# Altium PCB errorSchema.PcbDoc
Units mil, origin at the board's own origin, x right, y up, seen from the top; angles counter-clockwise.
Board outline 6070 x 2260 mil, 2 copper layers (Top Layer, Bottom Layer); 71 components, 51 nets, 252 pads, 51 vias.
Unrouted connection lines stored in the file: 29.
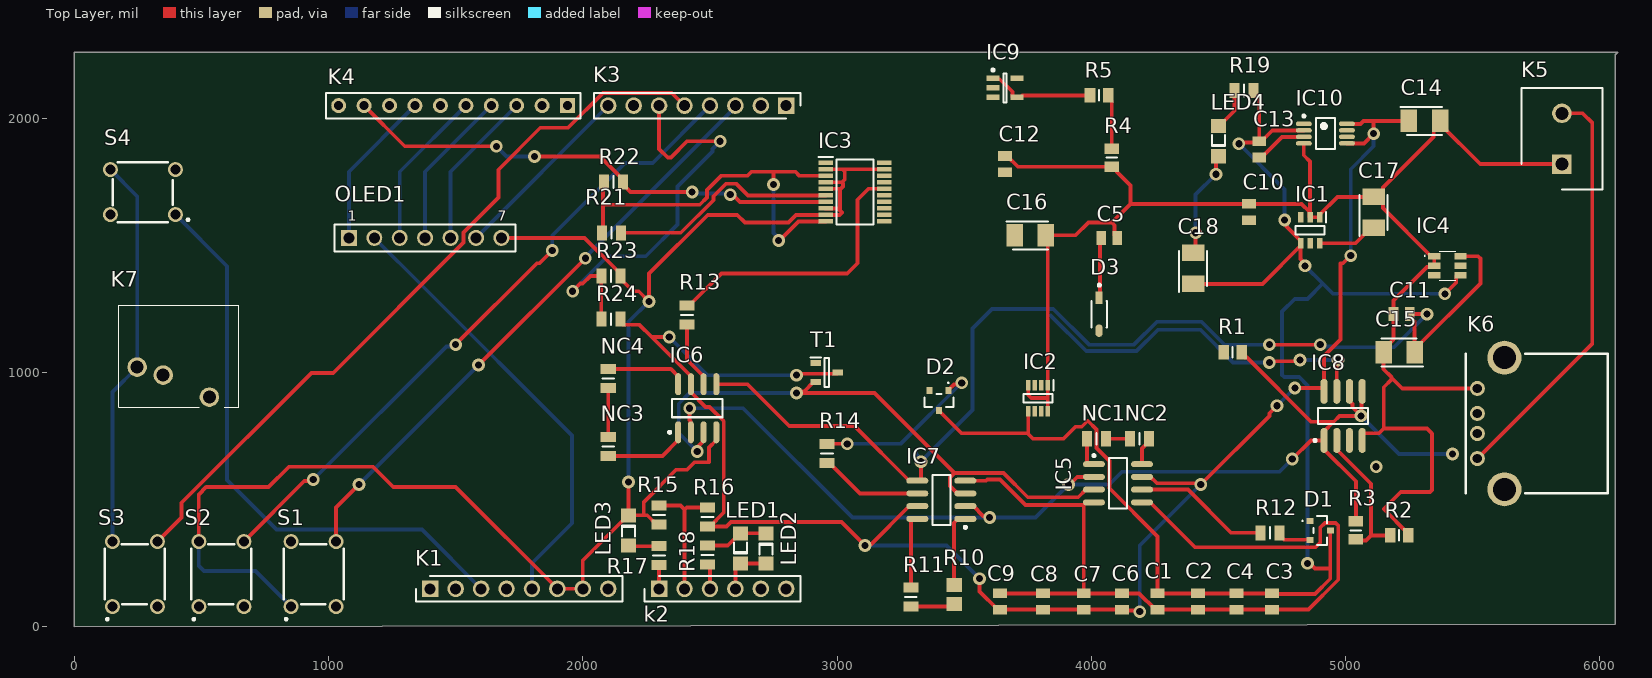
[diagram p0: Top Layer view]
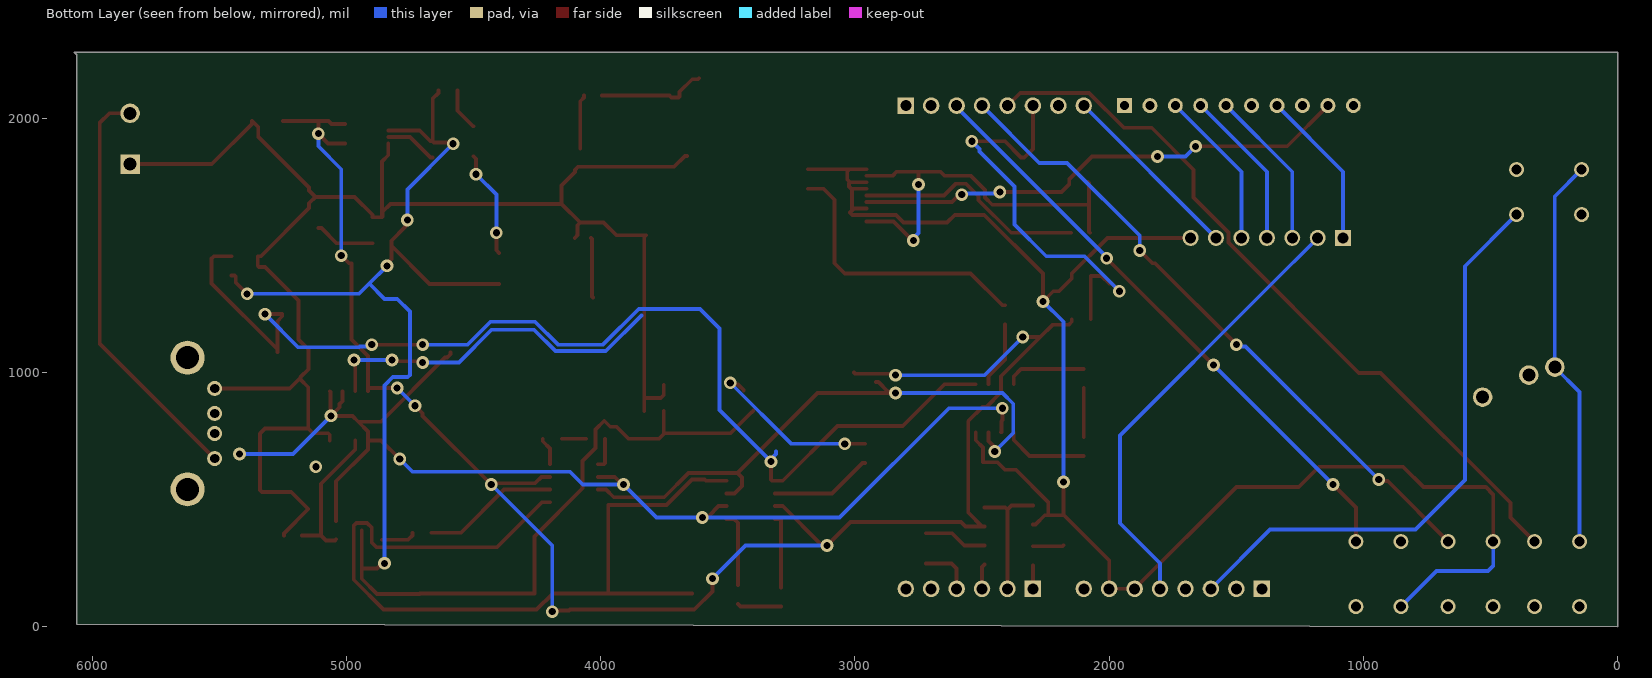
[diagram p1: Bottom Layer view, seen from below]
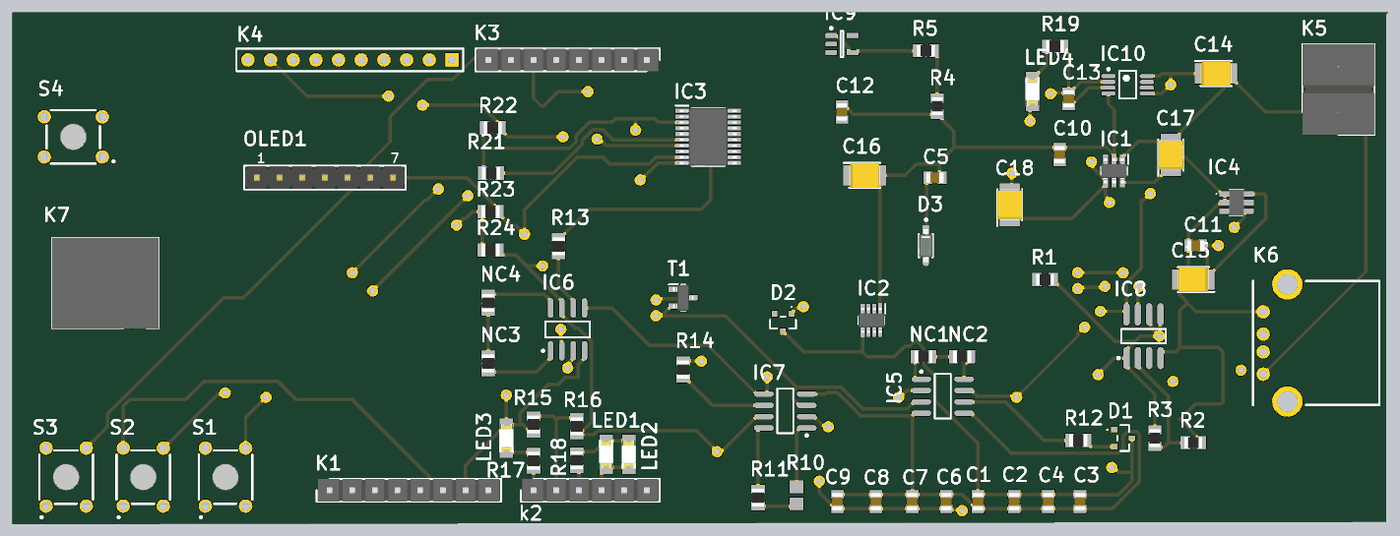
[diagram p2: 3D render of the assembled board from above, using the file's embedded part models]

## Layer stack, top to bottom
Top Solder: solder mask 0.4, Solder Resist, Dk 3.5
Top Layer: signal copper 1.4
Dielectric 1: dielectric 12.6, FR-4, Dk 4.8
Bottom Layer: signal copper 1.4
Bottom Solder: solder mask 0.4, Solder Resist, Dk 3.5

## Board outline
0,0 0,2260 6070,2260 6060,2250 6060,10

## Design rules (kind name [scope] priority, off if disabled: settings)
Clearance [All] p1: gap=10 ignorepadtopadclearanceinfootprint=TRUE except(0: SMDPad-Hole THPad-Hole Via-Hole Fill-Hole Poly-Hole Region-Hole Text-Hole; 8: Arc-Arc Arc-Track Arc-SMDPad Arc-THPad Arc-Via Arc-Fill Arc-Poly Arc-Region Arc-Text Arc-Hole Track-Track Track-SMDPad Track-THPad Track-Via Track-Fill Track-Poly Track-Region Track-Text Track-Hole)
PolygonConnect [All] p1: connectstyle=Relief reliefconductorwidth=10 reliefentries=4 polygonreliefangle="90 Angle" airgapwidth=10
RoutingVias [All] p1: holewidth=10 width=20 viastyle="Through Hole" minholewidth=10 minwidth=20 maxholewidth=10 maxwidth=20
SolderMaskExpansion [All] p1: expansion=4 istentingtop=FALSE
Width [All] p1: maxlimit=15 minlimit=15 preferedwidth=15 minimp=50.000000 maximp=50.000000 favimp=50.000000
30 further rules are at their usual default settings.

## Classes and differential pairs
component class totaal: C1 C2 C3 C4 C5 C6 C7 C8 C9 C10 C11 C13 C14 C15 C17 C18 D3 IC1 IC4 IC10 K7 LED4 R19
component class deel2: C12 C16 D1 D2 IC2 IC3 IC5 IC6 IC7 IC8 IC9 K1 k2 K3 K4 K5 K6 LED1 LED2 LED3 NC1 NC2 NC3 NC4 OLED1 R1 R2 R3 R4 R5 R10 R11 R12 R13 R14 R15 R16 R17 R18 R21 R22 R23 R24 S1 S2 S3 S4 T1

## Components (designator, comment, footprint, x,y, rotation, side; value= is the part's Value field where it differs from the comment)
C1 "MC0805B104K500CT" CAPC2012X90N 4260,100 r270 top
C2 "MC0805B104K500CT" CAPC2012X90N 4420,100 r270 top
C3 "MC0805B104K500CT" CAPC2012X90N 4710,100 r270 top
C4 "MC0805B104K500CT" CAPC2012X90N 4570,100 r270 top
C5 "MC0805B104K500CT" CAPC2012X90N 4070,1530 r180 top
C6 "MC0805B104K500CT" CAPC2012X90N 4120,100 r270 top
C7 "MC0805B104K500CT" CAPC2012X90N 3970,100 r270 top
C8 "MC0805B104K500CT" CAPC2012X90N 3810,100 r270 top
C9 "MC0805B104K500CT" CAPC2012X90N 3640,100 r270 top
C10 "MC0805B104K500CT" CAPC2012X90N 4620,1631.89 r270 top
C11 "MC0805B104K500CT" CAPC2012X90N 5220,1230 r0 top
C12 "MC0805B104K500CT" CAPC2012X90N 3660,1820 r90 top
C13 "MC0805N102J500CT" CAPC2012X90N 4660,1878.11 r90 top
C14 "T491B106M016AT" CAPPM3528X210N 5310,1990 r0 top
C15 "T491B106M016AT" CAPPM3528X210N 5210,1080 r180 top
C16 "T491B106M016AT" CAPPM3528X210N 3760,1540 r0 top
C17 "T491B106M016AT" CAPPM3528X210N 5110,1630 r90 top
C18 "T491B106M016AT" CAPPM3528X210N 4400,1410 r90 top
D1 "BAT54C" NXP-SOT23-3_V 4900,380 r90 top
D2 "BAT54C" NXP-SOT23-3_V 3400,890 r0 top
D3 "1N5819HW-7-F" FP-SOD123-IPC_B 4030,1230 r270 top
IC1 "LT1790ACS6-2.5#PBF" SOT95P280X100-6N 4860,1560 r270 top
IC2 "LTC2631CTS8-LZ12#TRMPBF" SOT65P280X100-8N 3790,900 r270 top
IC3 "LTC2309CF#PBF" SOP65P640X110-20N 3070,1710 r0 top
IC4 "LT1790BCS6-1.25#TRMPBF" LT1790BCS6125TRMPBF 5400,1420 r270 top
IC5 "LT1789CS8-1#PBF" LT-S8-8_N 4104.49,565 r0 top
IC6 "LT1789CS8-10#PBF" LT-S8-8_N 2450,860 r90 top
IC7 "LT1789CS8-10#PBF" LT-S8-8_N 3410,500 r180 top
IC8 "LTC6241HVCS8#PBF" LT-S8-8_M 4990,830 r90 top
IC9 "LTC2054HVCS5#TRMPBF" LT-S5-5-TSOT-23_N 3660,2120 r0 top
IC10 "LT1762EMS8-5#PBF" LT-MS8_N 4920,1940 r0 top
K1 "2211S-08G" HDRV8W64P0X254_1X8_2032X254X874P 1400,150 r0 top
k2 "2211S-06G" HDRV6W64P0X254_1X6_1524X254X1774P 2300,150 r0 top
K3 "2211S-08G" HDRV8W64P0X254_1X8_2032X254X874P 2800,2050 r180 top
K4 "Header 10" HDR1X10 1940,2050 r180 top
K5 "1729128" HDRV2W110P0X508_1X2_1016X810X1000P 5850,1820 r90 top
K6 "61400416021" USB-2.0-TYPE-A 6030,800 r90 top
K7 "NEB_J_21_R" NEBJ21R 247.64,1021.5 r0 top
LED1 "150120RS75000" 1206_A 2620,309.06 r90 top
LED2 "150120GS75000" 1206_A 2720,309.05 r270 top
LED3 "150120YS75000" 1206_A 2180,380 r270 top
LED4 "150120BS75000" 1206_A 4500,1910 r90 top
NC1 "0" RESC2014X65N 4020,740 r180 top
NC2 "0" RESC2014X65N 4190,740 r0 top
NC3 "MC01W08055100R" RESC2014X65N 2100,710 r270 top
NC4 "0" RESC2014X65N 2100,977.4 r90 top
OLED1 "61300711121" 61300711121 1380,1530 r0 top
R1 "MCTC0525B1000T5E" RESC2012X65N 4555.43,1080 r0 top
R2 "MCTC0525B1002T5E" RESC2012X65N 5210,360 r180 top
R3 "MCTC0525B1002T5E" RESC2012X65N 5040,380 r270 top
R4 "MCTC0525B1002T5E" RESC2012X65N 4080,1845.43 r90 top
R5 "MCTC0525B1002T5E" RESC2012X65N 4030,2090 r180 top
R10 "ERA6AEB223V" RESC2013X60X40ML20T25 3460,127.4 r90 top
R11 "220R 0.1%" RESC2014X65N 3290,117.4 r90 top
R12 "MC01W08055100R" RESC2014X65N 4702.6,370 r0 top
R13 "MC01W08055100R" RESC2014X65N 2410,1227.4 r90 top
R14 "100R" RESC2014X65N 2960,682.6 r90 top
R15 "3KR" RESC2014X65N 2300,440 r90 top
R16 "MC01W0805512K" RESC2014X65N 2490,432.6 r270 top
R17 "MC01W080551K" RESC2014X65N 2300,280 r270 top
R18 "MC01W080551K" RESC2014X65N 2490,282.6 r270 top
R19 "MC01W080551K" RESC2014X65N 4600,2110 r0 top
R21 "MC01W0805510K" RESC2014X65N 2112.6,1550 r180 top
R22 "MC01W0805510K" RESC2014X65N 2120,1750 r180 top
R23 "MC01W0805510K" RESC2014X65N 2110,1380 r180 top
R24 "22KR" RESC2014X65N 2110,1210 r0 top
S1 "FSM4JH" FSM4JH 941.42,207.95 r90 top
S2 "FSM4JH" FSM4JH 578.58,207.95 r90 top
S3 "FSM4JH" FSM4JH 238.58,207.95 r90 top
S4 "FSM4JH" FSM4JH 270,1710 r180 top
T1 "BC847C_AU,215" SOT95P230X110-3N 2960,1000 r0 top

## Footprints (in the part's own frame and the unit in brackets; to place one, negate y for a bottom-side part, rotate by r counter-clockwise, add the part's x,y. Pads: shape width x height; smd on the part's side, far side on the other; paste and mask are expansions set on the pad)
1206_A [mm] "Chip LED, 2-Leads, Body 3.2x1.6mm, IPC Medium Density"
  rect 1.4x1.5 smd: 1(-1.5,0) 2(1.5,0)
  silkscreen extent -0.5,-0.67 0.6,0.65, body extent -1.6,-0.8 1.6,0.8, height 0.68
61300711121 [mm] "Pin Header, pitch 2.54 mm, THT, Vertical, single row, 7p"
  rect 1.6x1.6 hole 1.1: 1(-7.62,0)
  round 1.6 hole 1.1: 2(-5.08,0) 3(-2.54,0) 4(0,0) 5(2.54,0) 6(5.08,0) 7(7.62,0)
  silkscreen extent -9.04,-1.34 9.04,1.34, body extent -8.89,-1.27 8.89,1.27, height 8.57
CAPC2012X90N [mm]
  rect 0.96x1.39 smd: 1(-0.81,0) 2(0.81,0)
  body extent -1,-0.63 1,0.63, height 0.9
CAPPM3528X210N [mm]
  rect 1.65x2.25 smd: 1(-1.55,0) 2(1.55,0)
  silkscreen extent -2.38,-1.4 1.75,1.4, body extent -1.75,-1.4 1.75,1.4, height 2.1
FP-SOD123-IPC_B [mil]
  rect 49.51x27.66 smd paste+0 mask+0: 1(-64.98,0)
  rrect100% 49.51x27.66 smd paste+0 mask+0: 2(64.98,0)
  silkscreen extent -119,-31 52,31, body extent -100,-40 100,40, height 10
FSM4JH [mm]
  round 1.5 hole 1: 1(-3.25,2.25) 2(3.25,2.25) 3(-3.25,-2.25) 4(3.25,-2.25)
  silkscreen extent -4.6,-3 3,3, body extent -3,-3.9 3,3.9
HDR1X10 [mm] "Connector; Header; 10 Position"
  rect 1.5x1.5 hole 0.9: 1(0,0)
  round 1.5 hole 0.9: 2(2.54,0) 3(5.08,0) 4(7.62,0) 5(10.16,0) 6(12.7,0) 7(15.24,0) 8(17.78,0) 9(20.32,0) 10(22.86,0)
  silkscreen extent -1.27,-1.27 24.13,1.27
HDRV2W110P0X508_1X2_1016X810X1000P [mm]
  rect 1.95x1.95 hole 1.3: 1(0,0)
  round 1.95 hole 1.3: 2(5.08,0)
  silkscreen extent -2.54,-4.05 7.62,4.05, body extent -2.54,-4.05 7.62,4.05, height 10
HDRV6W64P0X254_1X6_1524X254X1774P [mm]
  rect 1.65x1.65 hole 1.1: 1(0,0)
  round 1.65 hole 1.1: 2(2.54,0) 3(5.08,0) 4(7.62,0) 5(10.16,0) 6(12.7,0)
  silkscreen extent -1.45,-1.27 14.15,1.27, body extent -1.27,-1.27 13.97,1.27, height 17.74
HDRV8W64P0X254_1X8_2032X254X874P [mm]
  rect 1.65x1.65 hole 1.1: 1(0,0)
  round 1.65 hole 1.1: 2(2.54,0) 3(5.08,0) 4(7.62,0) 5(10.16,0) 6(12.7,0) 7(15.24,0) 8(17.78,0)
  silkscreen extent -1.45,-1.27 19.23,1.27, body extent -1.27,-1.27 19.05,1.27, height 8.74
LT1790BCS6125TRMPBF [mm]
  rect 0.62x1.22 smd: 1(-0.95,-1.31) 2(0,-1.31) 3(0.95,-1.31) 4(0.95,1.31) 5(0,1.31) 6(-0.95,1.31)
  silkscreen extent -1.45,-2.3 1.45,0.81, body extent -1.45,-0.81 1.45,0.81, height 1.1
LT-MS8_N [mm] "SOP, 8-Leads, Body 3x3mm, Pitch 0.65mm, IPC Medium Density"
  oval 1.6x0.45 smd: 1(-2.15,0.975) 2(-2.15,0.325) 3(-2.15,-0.325) 4(-2.15,-0.975) 5(2.15,-0.975) 6(2.15,-0.325) 7(2.15,0.325) 8(2.15,0.975)
  silkscreen extent -2.27,-1.55 0.95,1.87, body extent -1.55,-1.55 1.55,1.55, height 1.1
LT-S5-5-TSOT-23_N [mm] "SOT23, 5-Leads, Body 2.90x1.63mm, Pitch 0.95mm, IPC Medium Density"
  rect 1.3x0.55 smd: 1(-1.2,0.95) 2(-1.2,0) 3(-1.2,-0.95) 4(1.2,-0.95) 5(1.2,0.95)
  silkscreen extent -1.32,-1.45 0.15,1.9, body extent -0.87,-1.45 0.87,1.45, height 1
LT-S8-8_M [mm] "SOIC, 8-Leads, Body 4.9x3.9mm, Pitch 1.27mm, IPC Low Density"
  oval 2.5x0.7 smd: 1(-2.45,1.905) 2(-2.45,0.635) 3(-2.45,-0.635) 4(-2.45,-1.905) 5(2.45,-1.905) 6(2.45,-0.635) 7(2.45,0.635) 8(2.45,1.905)
  silkscreen extent -2.57,-2.5 0.8,2.93, body extent -2,-2.5 2,2.5, height 1.76
LT-S8-8_N [mm] "SOIC, 8-Leads, Body 4.9x3.9mm, Pitch 1.27mm, IPC Medium Density"
  oval 2.2x0.6 smd: 1(-2.4,1.905) 2(-2.4,0.635) 3(-2.4,-0.635) 4(-2.4,-1.905) 5(2.4,-1.905) 6(2.4,-0.635) 7(2.4,0.635) 8(2.4,1.905)
  silkscreen extent -2.52,-2.5 0.9,2.88, body extent -2,-2.5 2,2.5, height 1.76
NEBJ21R [mm]
  round 1.95 hole 1.3: 1(0,0) 2(2.6,-0.8) 3(7.2,-3)
  silkscreen extent -1.84,-4 10.16,6.2, body extent -1.84,-4 10.16,6.2, height 8.1
NXP-SOT23-3_V [mm] "SOT23, 3-Leads, Body 1.3x2.9mm, Pitch 0.95mm"
  rect 0.6x0.7 smd paste-0.05: 1(0.95,1) 2(-0.95,1) 3(0,-1)
  silkscreen extent -1.45,-0.65 1.45,1.79, body extent -1.45,-0.65 1.45,0.65, height 1.1
RESC2012X65N [mm]
  rect 1.05x1.45 smd: 1(-0.9,0) 2(0.9,0)
  silkscreen extent 0,-0.53 0,0.53, body extent -1,-0.63 1,0.63, height 0.65
RESC2013X60X40ML20T25 [mm] "Chip Resistor, 2-Leads, Body 2.00x1.25mm, IPC Low Density"
  rect 1.4x1.55 smd: 1(-0.95,0) 2(0.95,0)
  body extent -1.1,-0.72 1.1,0.72, height 0.6
RESC2014X65N [mm]
  rect 1x1.5 smd: 1(-0.95,0) 2(0.95,0)
  silkscreen extent 0,-0.59 0,0.59, body extent -1,-0.69 1,0.69, height 0.65
SOP65P640X110-20N [mm]
  rect 1.45x0.45 smd: 1(-2.925,2.925) 2(-2.925,2.275) 3(-2.925,1.625) 4(-2.925,0.975) 5(-2.925,0.325) 6(-2.925,-0.325) 7(-2.925,-0.975) 8(-2.925,-1.625) 9(-2.925,-2.275) 10(-2.925,-2.925) 11(2.925,-2.925) 12(2.925,-2.275) 13(2.925,-1.625) 14(2.925,-0.975) 15(2.925,-0.325) 16(2.925,0.325) 17(2.925,0.975) 18(2.925,1.625) 19(2.925,2.275) 20(2.925,2.925)
  silkscreen extent -3.65,-3.25 1.85,3.5, body extent -3.2,-3.25 3.2,3.25, height 1.1
SOT65P280X100-8N [mm]
  rect 1.05x0.45 smd: 1(-1.3,0.975) 2(-1.3,0.325) 3(-1.3,-0.325) 4(-1.3,-0.975) 5(1.3,-0.975) 6(1.3,-0.325) 7(1.3,0.325) 8(1.3,0.975)
  silkscreen extent -1.82,-1.45 0.42,1.55, body extent -1.4,-1.45 1.4,1.45, height 1
SOT95P230X110-3N [mm]
  rect 1.05x0.6 smd: 1(-1.1,0.95) 2(-1.1,-0.95) 3(1.1,0)
  silkscreen extent -1.62,-1.45 0.22,1.5, body extent -1.15,-1.45 1.15,1.45, height 1.1
SOT95P280X100-6N [mm]
  rect 1.05x0.55 smd: 1(-1.3,0.95) 2(-1.3,0) 3(-1.3,-0.95) 4(1.3,-0.95) 5(1.3,0) 6(1.3,0.95)
  silkscreen extent -1.82,-1.45 0.43,1.58, body extent -1.4,-1.45 1.4,1.45, height 1
USB-2.0-TYPE-A [mm]
  round 1.5 hole 0.92: 1(-3.5,13.01) 2(-1,13.01) 3(1,13.01) 4(3.5,13.01)
  round 3.4 hole 2.3: 5(-6.57,10.3) 6(6.57,10.3)
  silkscreen extent -6.95,0 6.95,14.15

## Part data
C1 C2 C3 C4 C5 C6 C7 C8 C9 C10 C11 C12 C13: "Capacitor", Manufacturer_Name=MULTICOMP, Height=0.9mm
  C1 C2 C3 C4 C5 C6 C7 C8 C9 C10 C11 C12: Datasheet Link=https://componentsearchengine.com/Datasheets/2/MC0805B104K500CT.pdf, Manufacturer_Part_Number=MC0805B104K500CT
  C13: Datasheet Link=http://www.farnell.com/datasheets/1901289.pdf, Manufacturer_Part_Number=MC0805N102J500CT
C14 C15 C16 C17 C18: "Capacitor Polarised", Manufacturer_Name=Kemet, Mouser Part Number=80-T491B106M016, Arrow Part Number=T491B106M016AT, Arrow Price/Stock=https://www.arrow.com/en/products/t491b106m016at/kemet-corporation, Datasheet Link=https://componentsearchengine.com/Datasheets/2/T491B106M016AT.pdf, Height=2.1mm, Manufacturer_Part_Number=T491B106M016AT, Mouser Price/Stock=https://www.mouser.co.uk/ProductDetail/KEMET/T491B106M016AT?qs=WydH9nGI6cAnkEyQJLjSzA%3D%3D
D1 D2: library part CMP-0417-00003-1, "Schottky Barrier Diode, 30 V, 2 uA, -55 to 150 degC, 3-Pin SOT23, RoHS, Tape and Reel", Manufacturer="NXP Semiconductors", Temperature Range="-55 to 150 degC", Cd (pF)=10, ComponentLink1Description="Manufacturer URL", ComponentLink1URL=http://www.nxp.com/, ComponentLink2Description=Datasheet, ComponentLink2URL=http://www.nxp.com/documents/data_sheet/BAT54_SER.pdf, DatasheetVersion="Rev. 5", IR (uA)=2, Mounting Technology="Surface Mount", PackageDescription="3-Pin Plastic Surface-mounted Package, Body 1.3 x 2.9 mm, Pitch 0.95 mm", PackageReference=SOT23-3, Packing="Tape and Reel", PartNumber=BAT54C, RoHS=TRUE, Rth(j-a) (K/W)=500, Trr (ns)=5, VF (mV)=800, VR (V)=30
D3: library part CMP-0303-00003-3, "DIODE SCHOTTKY 40V 1A SOD123", Average Rectified Current=1A, Capacitance=110pF, Case/Package=SOD-123-2, Forward Voltage=450mV, Max Forward Surge Current (Ifsm)=25A, Max Operating Temperature=125°C, Max Power Dissipation=450mW, Max Repetitive Reverse Voltage (Vrrm)=40V, Min Operating Temperature=-65°C, Package Quantity=3000, Peak Reverse Current=50uA, Contact Plating=Tin, Current Rating=1A, Element Configuration=Single, Forward Current=1A, Height=1.25mm, Lead Free="Lead Free", Length=2.85mm, Max Reverse Voltage (DC)=40V, Number of Pins=2, Output Current=1A, Packaging="Tape and Reel", Peak Non-Repetitive Surge Current=25A, Polarity=Standard, Radiation Hardening=No, REACH SVHC="No SVHC", Termination=SMD/SMT, Voltage Rating (DC)=40V, Weight=0.000353oz, Width=1.7mm
IC1: "Integrated Circuit", Manufacturer_Name="Linear Technology", Mouser Part Number=584-1790ACS6-2.5PBF, Datasheet Link=https://componentsearchengine.com/Datasheets/2/LT1790ACS6-2.5#PBF.pdf, Height=1mm, Manufacturer_Part_Number=LT1790ACS6-2.5#PBF, Mouser Price/Stock=https://www.mouser.com/Search/Refine.aspx?Keyword=584-1790ACS6-2.5PBF
IC2: "Integrated Circuit", Manufacturer_Name="Analog Devices", Mouser Part Number=584-2631CTS8LZ12TMPF, Arrow Part Number=LTC2631CTS8-LZ12#TRMPBF, Arrow Price/Stock=https://www.arrow.com/en/products/ltc2631cts8-lz12trmpbf/analog-devices, Datasheet Link=https://www.analog.com/media/en/technical-documentation/data-sheets/2631fd.pdf, Height=1mm, Manufacturer_Part_Number=LTC2631CTS8-LZ12#TRMPBF, Mouser Price/Stock=https://www.mouser.co.uk/ProductDetail/Analog-Devices/LTC2631CTS8-LZ12TRMPBF?qs=hVkxg5c3xu%252BAZArayp8N8g%3D%3D
IC3: "Integrated Circuit", Manufacturer_Name="Linear Technology", Mouser Part Number=584-LTC2309CF#PBF, Arrow Part Number=LTC2309CF#PBF, Arrow Price/Stock=https://www.arrow.com/en/products/ltc2309cfpbf/linear-technology, Datasheet Link=http://docs-emea.rs-online.com/webdocs/10c2/0900766b810c2cad.pdf, Height=1.1mm, Manufacturer_Part_Number=LTC2309CF#PBF, Mouser Price/Stock=https://www.mouser.com/Search/Refine.aspx?Keyword=584-LTC2309CF%23PBF
IC4: "Integrated Circuit", Manufacturer_Name="Analog Devices", Mouser Part Number=584-1790BCS61.25TMPF, Arrow Part Number=LT1790BCS6-1.25#TRMPBF, Arrow Price/Stock=https://www.arrow.com/en/products/lt1790bcs6-1.25trmpbf/analog-devices, Datasheet Link=https://www.arrow.com/en/products/lt1790bcs6-1.25trmpbf/analog-devices, Height=1mm, Manufacturer_Part_Number=LT1790BCS6-1.25#TRMPBF, Mouser Price/Stock=https://www.mouser.co.uk/ProductDetail/Analog-Devices/LT1790BCS6-125TRMPBF/?qs=ytflclh7QUXpPD13KZ8jjg%3D%3D
IC5: library part CMP-0359-03660-2, "Single Channel, Micropower, Single Supply Rail-to-Rail Output Instrumentation Amplifiers, 0.06 MHz Typical GBW, 0.026 V/us Typical SR, 2.2 to 36 V, 8-Pin SOIC (S8-8), Commercial, Pb-Free", Linear Technology Part Number=LT1789-1, Manufacturer="Linear Technology", Channels (#)=1, ComponentLink1Description="Manufacturer URL", ComponentLink1URL=http://www.linear.com/, ComponentLink2Description=Datasheet, ComponentLink2URL=http://cds.linear.com/docs/en/datasheet/1789fc.pdf, ComponentLink3Description="Package Specification", ComponentLink3URL=http://cds.linear.com/docs/en/packaging/05081610_G_SO8.pdf, DatasheetVersion="Rev. C", GBW (MHz) Typical=0.06, Is (mA) Typical=0.067, Mounting Technology="Surface Mount", PackageDescription="8-Pin Plastic Small Outline, Body 4.9 x 3.9 mm, Pitch 1.27 mm", PackageReference=LT-S8-8, PackageVersion="Rev G", PartNumber=LT1789CS8-1#PBF, RevisionNote="URLs updated", RoHS=Pb-Free, SR (V/us) Typical=0.026, Type=IA, Vos (mV) Guaranteed=0.75, Vos (mV) Typical=0.15, Vs Max (V)=36, Vs Min (V)=2.2
IC6 IC7: library part CMP-0359-03644-3, "Single Channel, Micropower, Single Supply Rail-to-Rail Output Instrumentation Amplifiers, 0.06 MHz Typical GBW, 0.026 V/us Typical SR, 2.2 to 36 V, 8-Pin SOIC (S8-8), Commercial, Pb-Free", Linear Technology Part Number=LT1789-10, Manufacturer="Linear Technology", Channels (#)=1, ComponentLink1Description="Manufacturer URL", ComponentLink1URL=http://www.linear.com/, ComponentLink2Description=Datasheet, ComponentLink2URL=http://cds.linear.com/docs/en/datasheet/1789fc.pdf, ComponentLink3Description="Package Specification", ComponentLink3URL=http://cds.linear.com/docs/en/packaging/05081610_G_SO8.pdf, DatasheetVersion="Rev. C", GBW (MHz) Typical=0.06, Is (mA) Typical=0.067, Mounting Technology="Surface Mount", PackageDescription="8-Pin Plastic Small Outline, Body 4.9 x 3.9 mm, Pitch 1.27 mm", PackageReference=LT-S8-8, PackageVersion="Rev G", PartNumber=LT1789CS8-10#PBF, RevisionNote="URLs updated", RoHS=Pb-Free, SR (V/us) Typical=0.026, Type=IA, Vos (mV) Guaranteed=3, Vos (mV) Typical=0.65, Vs Max (V)=36, Vs Min (V)=2.2
IC8: library part CMP-0359-02698-2, "Dual Channel, Low Noise, CMOS Operational Amplifier, RRO, 18 MHz Typical GBW, 10 V/us Typical SR, 2.8 to 12 V, 8-Pin SOIC (S8-8), Commercial, Pb-Free", Linear Technology Part Number=LTC6241HV, Manufacturer="Linear Technology", Channels (#)=2, ComponentLink1Description="Manufacturer URL", ComponentLink1URL=http://www.linear.com/, ComponentLink2Description=Datasheet, ComponentLink2URL=http://cds.linear.com/docs/en/datasheet/624012fe.pdf, ComponentLink3Description="Package Specification", ComponentLink3URL=http://cds.linear.com/docs/en/packaging/05081610_G_SO8.pdf, DatasheetVersion="Rev. E", GBW (MHz) Typical=18, Is (mA) Typical=1.8, Mounting Technology="Surface Mount", PackageDescription="8-Pin Plastic Small Outline, Body 4.9 x 3.9 mm, Pitch 1.27 mm", PackageReference=LT-S8-8, PackageVersion="Rev G", PartNumber=LTC6241HVCS8#PBF, RevisionNote="URLs updated", RoHS=Pb-Free, SR (V/us) Typical=10, Type=VFB, Vos (mV) Typical=0.04, Vs Max (V)=12, Vs Min (V)=2.8
IC9: library part CMP-0359-02161-2, "Single Channel, Micropower Zero-Drift Operational Amplifier, 0.5 MHz Typical GBW, 0.5 V/us Typical SR, 2.7 to 11 V, 5-Pin SOT23 (S5-5), Commercial, Pb-Free, Mini Reel", Linear Technology Part Number=LTC2054HV, Manufacturer="Linear Technology", Channels (#)=1, Code_JEDEC=MO-193, ComponentLink1Description="Manufacturer URL", ComponentLink1URL=http://www.linear.com/, ComponentLink2Description=Datasheet, ComponentLink2URL=http://cds.linear.com/docs/en/datasheet/20545fc.pdf, ComponentLink3Description="Package Specification", ComponentLink3URL=http://cds.linear.com/docs/en/packaging/SOT_5_05-08-1635.pdf, DatasheetVersion="Rev. C", GBW (MHz) Typical=0.5, Is (mA) Typical=0.15, Mounting Technology="Surface Mount", PackageDescription="5-Lead Plastic TSOT-23, Body 1.63 x 2.90 mm, Pitch 0.95 mm", PackageReference=LT-S5-5-TSOT-23, Packing="Mini Reel", PartNumber=LTC2054HVCS5#TRMPBF, RevisionNote="URLs updated", RoHS=Pb-Free, SR (V/us) Typical=0.5, Type=ZD, Vos (mV) Typical=0.0005, Vs Max (V)=11, Vs Min (V)=2.7
IC10: library part CMP-0476-00707-1, "150 mA, Low Noise, LDO Micropower Regulator, 1.8 to 20 V Vin, 5 V Vout, 8-pin SOP (MS8-8), -40 to 125 degC, Pb-Free", Dropout Voltage(V)=0.27, Manufacturer="Linear Technology", Output Voltage="5 V", Shutdown Current(uA)=1, ComponentLink1Description="Manufacturer URL", ComponentLink1URL=http://www.linear.com/, ComponentLink2Description=Datasheet, ComponentLink2URL=http://cds.linear.com/docs/en/datasheet/1762fa.pdf, ComponentLink3Description="Package Specification", ComponentLink3URL=http://cds.linear.com/docs/en/packaging/05081660_G_MS8.pdf, DatasheetVersion="Rev. A", Discrete Pass Element=no, Iout(mA)=150, Isupply(mA)=0.025, Mounting Technology="Surface Mount", Noise(uV)=20, Number of Outputs=1, PackageDescription="8-Pin Plastic MSOP, Body 3 x 3 mm, Pitch 0.65 mm", PackageReference=MS8, PackageVersion="Rev. G, 05/2013", PartNumber=LT1762EMS8-5#PBF, PSRR(dB)=65, RoHS=TRUE, Vin Max(V)=20, Vin Min(V)=1.8
K1 k2 K3: "Connector", Manufacturer_Name=MULTICOMP
  K1 K3: Datasheet Link=https://componentsearchengine.com/Datasheets/2/2211S-08G.pdf, Height=8.74mm, Manufacturer_Part_Number=2211S-08G
  k2: Datasheet Link=http://www.farnell.com/datasheets/1518407.pdf, Height=17.74mm, Manufacturer_Part_Number=2211S-06G
K4: "Header, 10-Pin", LatestRevisionDate=17-Jul-2002, LatestRevisionNote="Re-released for DXP Platform.", Publisher="Altium Limited"
K5: "Connector", Manufacturer_Name="Phoenix Contact", Mouser Part Number=651-1729128, Arrow Part Number=1729128, Arrow Price/Stock=https://www.arrow.com/en/products/1729128/phoenix-contact, Datasheet Link=http://docs-emea.rs-online.com/webdocs/1380/0900766b81380189.pdf, Height=10mm, Manufacturer_Part_Number=1729128, Mouser Price/Stock=https://www.mouser.co.uk/ProductDetail/Phoenix-Contact/1729128/?qs=GFUSqQMLmmnCBVBY3dts9w%3D%3D
K6: "Connector", Manufacturer_Name="Wurth Elektronik", Mouser Part Number=710-61400416021, Datasheet Link=http://katalog.we-online.de/em/datasheet/61400416021.pdf, Manufacturer_Part_Number=61400416021, Mouser Price/Stock=https://www.mouser.co.uk/ProductDetail/Wurth-Elektronik/61400416021/?qs=rS3zZhy2AQM1ZldAqz%2FFOw%3D%3D
K7: "Connector", Manufacturer_Name=LUMBERG, Manufacturer_Part_Number="NEB/J 21 R", Datasheet Link=http://www.farnell.com/datasheets/2047481.pdf?_ga=2.269136052.479969064.1560760329-167411096.1502103357, Height=8mm
LED1: library part CMP-1426-00013-1, "SMD mono-color Chip LED, WL-SMCW, Red", Color=Red, Manufacturer="Wuerth Elektronik", ComponentLink1Description="Manufacturer URL", ComponentLink1URL=http://www.we-online.com, ComponentLink2Description=Datasheet, ComponentLink2URL=http://katalog.we-online.com/led/datasheet/150120RS75000.pdf, PackageReference=1206_A, PartNumber=150120RS75000
LED2: library part CMP-1426-00014-1, "SMD mono-color Chip LED, WL-SMCW, Green", Color=Green, Manufacturer="Wuerth Elektronik", ComponentLink1Description="Manufacturer URL", ComponentLink1URL=http://www.we-online.com, ComponentLink2Description=Datasheet, ComponentLink2URL=http://katalog.we-online.com/led/datasheet/150120GS75000.pdf, PackageReference=1206_A, PartNumber=150120GS75000
LED3: library part CMP-1426-00019-1, "SMD mono-color Chip LED, WL-SMCW, Yellow", Color=Yellow, Manufacturer="Wuerth Elektronik", ComponentLink1Description="Manufacturer URL", ComponentLink1URL=http://www.we-online.com, ComponentLink2Description=Datasheet, ComponentLink2URL=http://katalog.we-online.com/led/datasheet/150120YS75000.pdf, PackageReference=1206_A, PartNumber=150120YS75000
LED4: library part CMP-1426-00015-1, "SMD mono-color Chip LED, WL-SMCW, Blue", Color=Blue, Manufacturer="Wuerth Elektronik", ComponentLink1Description="Manufacturer URL", ComponentLink1URL=http://www.we-online.com, ComponentLink2Description=Datasheet, ComponentLink2URL=http://katalog.we-online.com/led/datasheet/150120BS75000.pdf, PackageReference=1206_A, PartNumber=150120BS75000
NC1 NC2 NC4 R11 R14 R15 R24: library part MC01W08055100R, "Resistor", Manufacturer_Name=MULTICOMP, Datasheet Link=http://www.farnell.com/datasheets/1729047.pdf, Height=0.65mm, Manufacturer_Part_Number=MC01W08055100R
NC3 R1 R2 R3 R4 R5 R12 R13 R16 R17 R18 R19 R21 R22 R23: "Resistor", Manufacturer_Name=MULTICOMP, Height=0.65mm
  NC3 R12 R13: Datasheet Link=http://www.farnell.com/datasheets/1729047.pdf, Manufacturer_Part_Number=MC01W08055100R
  R1: Datasheet Link=https://componentsearchengine.com/Datasheets/2/MCTC0525B1001T5E.pdf, Manufacturer_Part_Number=MCTC0525B1000T5E
  R2 R3 R4 R5: Datasheet Link=https://componentsearchengine.com/Datasheets/2/MCTC0525B1001T5E.pdf, Manufacturer_Part_Number=MCTC0525B1002T5E
  R16: Datasheet Link=http://www.farnell.com/datasheets/1729047.pdf, Manufacturer_Part_Number=MC01W0805512K
  R17 R18 R19: Datasheet Link=http://www.farnell.com/datasheets/1729047.pdf, Manufacturer_Part_Number=MC01W080551K
  R21 R22 R23: Datasheet Link=http://www.farnell.com/datasheets/1729047.pdf, Manufacturer_Part_Number=MC01W0805510K
OLED1: library part CMP-1502-01074-1, "THT Vertical Pin Header WR-PHD, Pitch 2.54 mm, Single Row, 7 pins", Contact Resistance=20mOhm, Manufacturer="Wurth Elektronik", Operating Temperature=-40to105degC, Rated Current=3A, Withstanding Voltage=500VAC, Working Voltage=250VAC, Datasheet URL=https://katalog.we-online.de/em/datasheet/6130xx11121.pdf, Gender=Male, Manufacturer URL=http://www.we-online.de, Mounting Technology=THT, Orientation=Vertical, Package Reference=61300711121, Packaging=Bag, Part Number=61300711121, Pin Number=7, Pitch=2.54mm, Publisher=WurthElektronik, Row Number=Single
R10: library part CMP-2001-00614-1, Manufacturer=Panasonic, Part Number=ERA6AEB223V
S1 S2 S3 S4: "Switch", Manufacturer_Name="TE Connectivity", Mouser Part Number=506-FSM4JH, Arrow Part Number=FSM4JH, Arrow Price/Stock=https://www.arrow.com/en/products/fsm4jh/te-connectivity, Datasheet Link=http://www.te.com/commerce/DocumentDelivery/DDEController?Action=showdoc&DocId=Customer+Drawing%7F1825910%7FC9%7Fpdf%7FEnglish%7FENG_CD_1825910_C9.pdf%7F1825910-6, Manufacturer_Part_Number=FSM4JH, Mouser Price/Stock=https://www.mouser.co.uk/ProductDetail/TE-Connectivity-Alcoswitch/FSM4JH/?qs=g%252BEszo6zu8OwVWrHD2r3Rw%3D%3D
T1: "Transistor BJT NPN", Manufacturer_Name=Nexperia, Manufacturer_Part_Number=BC847C/AU,215, Datasheet Link=http://assets.nexperia.com/documents/data-sheet/BC847_SER.pdf, Height=1.1mm

## Via types
v1: diameter 50, hole 28, Top Layer to Bottom Layer, 51 vias

## Nets (pads, with @x,y where several pads share a name; then routed paths per layer and width w, separated by ;. In a path a pad name is that pad's centre, name@x,y a point inside that pad or via, vN(x,y) a via of type N, cw(c..) or ccw(c..) an arc to the next point about the centre after c; other vN are vias at no path point)
+1.25: C11.2 C15.1 IC3.15 IC3.17 IC4.6 IC6.5 IC7.5 | length 4472.5
  Top Layer w15: IC6.5 2647.25,954.49 2811.74,790 3069.02,790 3284.02,575 IC7.5 3326.02,575 3330,578.98 v1(3330,650) ; v1(4700,1110) v1(4900,1110) ; C15.1 C15.1@5271.02,1091.81 ; v1(5320,1230) C11.2 5251.89,1221.54 5271.02,1202.4 C15.1@5271.02,1091.81 ; IC4.6 5521.21,1457.4 5530,1448.62 5530,1350.79 C15.1@5271.02,1091.81
  Bottom Layer w15: 3310,690 3310,679.47 3330,659.47 v1(3330,650) 3532.5,852.5 3532.5,1173.71 3608.79,1250 3850,1250 3990,1110 4167.5,1110 4257.5,1200 4432.5,1200 4522.5,1110 v1(4700,1110) ; v1(4900,1110) 4906.7,1103.3 4946.7,1103.3 4950,1100 5190,1100 v1(5320,1230)
+2.5: C10.2 C12.1 C17.1 IC1.6 IC2.6 IC3.20 | length 237.5
  Top Layer w15: IC1.6 5038.03,1508.82 5098.19,1568.98 C17.1
+5: C1.1 C2.1 C3.1 C4.1 C13.2 C18.1 D1.3 D2.3 IC1.4 IC2.5 IC3.3 IC3.10 IC4.4 IC10.1 IC10.2 R19.2 R21.2 R22.2 | length 7720.4
  Top Layer w15: R21.2 2078.9,1553.7 2078.9,1660 ; R22.2 2078.9,1746.3 2078.9,1660 ; v1(2750,1740) 2749.41,1740.59 2749.41,1790 ; v1(2770,1520) 2773.84,1520 2848.68,1594.84 IC3.10 ; IC3.3 2852.13,1773.98 2836.1,1790 2749.41,1790 ; D2.3 3400,848.66 3404.31,844.35 3406.28,844.35 3489.02,761.61 3751.61,761.61 ; IC2.5 3751.61,761.61 ; C18.1 4672.6,1348.98 IC1.4@4822.6,1498.98 ; v1(4580,1900) 4585,1905 4655,1905 C13.2 ; R19.2 4637.4,2100.16 4660,2077.56 C13.2 ; v1(4760,1600) 4766.7,1593.3 4766.7,1574.56 4822.6,1518.66 IC1.4 IC1.4@4822.6,1498.98 ; IC10.2 4711.26,1952.8 4668.46,1910 C13.2 ; v1(4840,1420) 4840,1429.47 4822.6,1446.87 IC1.4@4822.6,1498.98 ; v1(4850,250) 4859.47,250 4879.47,230 4939.37,230 ; D1.3 4939.37,230 ; v1(5390,1310) 5435.06,1355.06 5435.06,1377.89 5439.76,1382.6 IC4.4 ; 2078.9,1660 2460,1660 2488.49,1688.49 2488.49,1718.49 2543.98,1773.98 2646.69,1773.98 2662.72,1790 2749.41,1790 ; 3751.61,761.61 3750,760 3770,740 3890,740 3937.03,787.03 3962.29,787.03 3985.91,810.65 4020.22,776.34 4020.22,703.22 4070.81,652.63 4070.81,545.22 4260,356.03 C1.1 C2.1 C4.1 C3.1 4711.89,130 4880,130 4939.37,189.37 4939.37,230
  Bottom Layer w15: v1(2750,1740) 2750,1549.47 2770,1529.47 v1(2770,1520) ; v1(4580,1900) 4760,1720 v1(4760,1600) ; v1(4840,1420) 4910,1350 ; v1(4850,250) 4850,950.1 4817.6,982.5 4758.79,982.5 4750,991.29 4750,1240 4800,1290 4850,1290 4910,1350 ; v1(5390,1310) 4950,1310 4910,1350
GND: C1.2 C2.2 C3.2 C4.2 C5.1 C6.1 C7.1 C8.1 C9.1 C10.1 C11.1 C12.2 C14.2 C15.2 C16.2 C17.2 IC1.1 IC1.2 IC2.1 IC2.4 IC2.8 IC3.2 IC3.4 IC3.5 IC3.8 IC3.9 IC3.11 IC3.13 IC3.19 IC4.1 IC4.2 IC5.4 IC5.5 IC6.4 IC7.4 IC8.4 IC10.4 K1.6 K1.7 K4.7 K5.1 K6.4 K7.1 LED3.1 OLED1.1 OLED1.7 R2.1 R4.1 R15.1 R23.1 S1.1 S2.2 S3.2 S4.4 | length 18781.9
  Top Layer w15: S2.2 490,521.21 518.79,550 764.09,550 844.09,630 1174.7,630 1254.7,550 1500,550 K1.6 K1.7 2000,261.02 2178.03,439.06 LED3.1 ; OLED1.7 2007.24,1530 2147.4,1389.84 R23.1 2147.4,1370.16 2197.56,1320 2220,1320 v1(2260,1280) 2260,1389.29 2491.14,1620.43 2607.07,1620.43 2637.5,1590 2808.48,1590 2838.92,1620.43 IC3.9 3010.43,1620.43 3020,1630 3011.99,1638.01 ; v1(2180,570) LED3.1 ; R15.1 2290.16,402.6 2253.7,439.06 2240,439.06 ; IC6.4 2525,734.02 2496.08,705.1 2496.08,647.27 2438.25,647.27 2409.34,618.35 2366.99,618.35 2240,491.36 2240,439.06 ; IC3.8 3003.98,1646.02 3011.99,1638.01 ; IC3.5 3013.98,1722.8 ; IC3.4 3018.39,1748.39 ; IC3.2 3020.43,1799.57 ; IC3.19 3020.43,1799.57 ; IC7.4 3586.66,575 3591.66,580 3640,580 3740.84,479.16 3970,479.16 C7.1 ; C9.1 C8.1 C7.1 ; C12.2 3668.46,1851.89 3710.35,1810 R4.1 4087.87,1810 4101.04,1796.83 4101.04,1788.96 4153.78,1736.22 4153.78,1663.78 ; IC2.4 3751.61,911.61 3763.23,900 3828.39,900 ; IC2.8 3828.39,900 ; C5.1 4090.49,1541.4 4090.49,1579.51 4080,1590 ; IC5.5 4230.47,490 4407.19,313.29 4881.66,313.29 4900,331.63 4900,390.97 4918.34,409.31 4960.4,409.31 4970.65,399.06 4970.65,185.29 4853.47,68.11 C3.2 C4.2 C2.2 C1.2 4251.54,68.11 4187.76,131.89 C6.1 C7.1 ; IC10.4 4835.35,1854.65 4860,1830 IC1.2 ; IC8.4 5065,755.68 5070.8,761.48 5131.48,761.48 5150,780 ; R2.1 5245.43,367.87 5150,463.31 5216.69,530 5331.21,530 5340,538.79 5340,760 5320,780 5150,780 ; K6.4 5222.21,937.79 5180,980 ; K5.1 5529.21,1820 5371.02,1978.19 C14.2 5346.04,1965.02 5346.04,1927.07 5146.79,1727.82 5146.79,1716 C17.2@5121.81,1691.02 ; LED3.1 2240,439.06 ; 3011.99,1638.01 3011.99,1720.81 3013.98,1722.8 ; 3013.98,1722.8 3022.76,1731.58 3022.76,1744.01 3018.39,1748.39 ; 3018.39,1748.39 3030,1760 3030,1790 3020.43,1799.57 ; 3828.39,900 IC2.1 3828.39,1532.64 C16.2 3938,1540 3988,1590 4080,1590 ; 4080,1590 4153.78,1663.78 ; 4153.78,1663.78 C10.1 4826.24,1663.78 4856.67,1633.35 4856.67,1614.51 IC1.2 ; IC1.2 IC1.1 4897.4,1621.02 4967.4,1691.02 C17.2 C17.2@5121.81,1691.02 ; C17.2@5121.81,1691.02 5146.79,1666.04 5146.79,1647.23 5336.61,1457.4 IC4.1 IC4.2 5343.72,1415.3 5320.15,1415.3 5188.11,1283.25 C11.1 5188.11,1130.95 5148.98,1091.81 C15.2 5148.98,1013.21 5180,982.18 5180,980 ; 5150,780 5150,942.82 5180,972.82 5180,980
  Bottom Layer w15: S4.4 247.64,1692.99 K7.1 150,923.86 S3.2 ; S2.2 490,240 510,220 712.84,220 S1.1 ; OLED1.1 1080,1790 K4.7 ; v1(2180,570) 2180,1200 v1(2260,1280)
NetC13_1: C13.1 IC10.3 | length 208.9
  Top Layer w15: C13.1 4668.46,1846.22 4749.45,1927.2 IC10.3
NetC16_1: C16.1 IC3.1
NetC18_2: C18.2 LED4.1 | length 421.3
  Top Layer w15: C18.2 4410,1481.02 v1(4410,1550) ; v1(4490,1780) 4490,1840.94 LED4.1
  Bottom Layer w15: v1(4410,1550) 4410,1700 v1(4490,1780)
NetD1_2: D1.2 IC3.14 R12.2 | length 137.7
  Top Layer w15: R12.2 4740,360.16 4757.56,342.6 D1.2
NetD2_1: D2.1 IC3.18 R14.2 | length 695.9
  Top Layer w15: R14.2 v1(3040,720) ; D2.1 3437.4,931.34 3459.37,953.3 3483.3,953.3 v1(3490,960)
  Bottom Layer w15: v1(3040,720) 3250,720 v1(3490,960)
NetD2_2: D2.2 IC3.16 R13.2 | length 1111.3
  Top Layer w15: R13.2 2419.84,1264.8 2545.04,1390 3040,1390 3080,1430 3080,1680 3122.8,1722.8 IC3.16
NetD3_2: D3.2 K7.2
NetIC2_2: IC2.2 IC3.6 K4.10 R21.1 | length 912.9
  Top Layer w15: R21.1 2385.36,1550 2513.49,1678.14 2513.49,1693.6 2562.4,1742.5 2604.11,1742.5 2650,1696.61 2650.59,1697.2 IC3.6
NetIC2_3: IC2.3 IC3.7 K4.9 R22.1 | length 1983.1
  Top Layer w15: K4.9 1300,1890 v1(1660,1890) ; v1(1810,1850) 2067.24,1850 2157.4,1759.84 R22.1 2157.4,1740.16 2187.56,1710 v1(2430,1710) ; v1(2580,1700) 2589.47,1700 2617.86,1671.61 IC3.7
  Bottom Layer w15: v1(1660,1890) 1700,1850 v1(1810,1850) ; v1(2430,1710) 2435,1705 2575,1705 v1(2580,1700)
NetIC2_7: IC2.7 IC8.3
NetIC3_12: IC3.12 R4.2 R5.1 | length 215.2
  Top Layer w15: R5.1 4065.43,2082.13 4080,2067.56 R4.2
NetIC5_1: IC5.1 NC1.2 | length 125.1
  Top Layer w15: NC1.2 3982.6,643.98 3986.58,640 IC5.1
NetIC5_2: IC5.2 IC6.2 IC7.2 IC8.1 IC8.5 IC8.6 IC9.3 K5.2 K6.1 R1.2 R3.1 | length 6455.6
  Top Layer w15: v1(2420,860) 2420,812.5 2423.35,809.15 2423.35,767.16 IC6.2 ; IC7.2 3535.98,475 3574.29,436.7 3593.3,436.7 v1(3600,430) ; v1(3910,560) 3914.19,560 3944.19,590 IC5.2 ; R1.2 4590.87,1072.13 4604.04,1058.96 4611.91,1058.96 4863.88,806.99 4953.01,806.99 ; v1(4790,660) 4863.54,733.54 IC8.1 ; IC8.6 5015,887.63 5026.41,876.21 5026.41,863.59 v1(5060,830) ; R3.1 5040,573.11 4915,698.11 IC8.1 ; IC8.5 5062.6,924.06 5062.6,832.6 v1(5060,830) ; K6.1 5970,1114.41 5970,1981.21 5931.21,2020 K5.2 ; IC8.1 4915,768.98 4953.01,806.99 ; 4953.01,806.99 4976.02,830 v1(5060,830)
  Bottom Layer w15: v1(2420,860) 2630,860 3060,430 v1(3600,430) 3780,430 v1(3910,560) 4070,560 4120,610 4740,610 v1(4790,660) ; v1(5060,830) 5210,680 v1(5420,680)
NetIC5_3: IC5.3 IC6.3 IC7.3 R1.1 T1.2 | length 2361.2
  Top Layer w15: v1(2450,690) 2456.7,696.7 2456.7,713.38 2475,731.68 IC6.3 ; T1.2 2907.83,962.6 2871.93,926.7 2846.7,926.7 v1(2840,920) 3146.54,920 3461.54,605 ; IC7.3 3472.99,525 3443.68,554.31 3443.68,587.14 3461.54,605 ; IC5.3 3978.5,540 3948.5,510 3750,510 3655,605 3461.54,605
  Bottom Layer w15: v1(2450,690) 2377.5,762.5 2377.5,877.6 2419.9,920 v1(2840,920)
NetIC5_6: IC5.6 R12.1 | length 536.6
  Top Layer w15: IC5.6 4380,540 4550,370 R12.1
NetIC5_8: IC5.8 NC2.2 | length 111.8
  Top Layer w15: IC5.8 4198.98,701.73 4227.4,730.16 NC2.2
NetIC6_1: IC6.1 NC3.2 | length 331.9
  Top Layer w15: NC3.2 2313.58,672.6 2375,734.02 IC6.1
NetIC6_6: IC6.6 R13.1 | length 262.4
  Top Layer w15: R13.1 2410,1050.98 2475,985.98 IC6.6
NetIC6_8: IC6.8 NC4.2 | length 318.4
  Top Layer w15: NC4.2 2346.18,1014.8 2375,985.98 IC6.8
NetIC7_1: IC7.1 R10.2 | length 295.7
  Top Layer w15: R10.2 3460,409.68 3475.33,425 IC7.1
NetIC7_6: IC7.6 R14.1 | length 405.3
  Top Layer w15: R14.1 2969.84,645.2 3090.04,525 IC7.6
NetIC7_8: IC7.8 R11.2 | length 293.4
  Top Layer w15: R11.2 3290,421.02 3293.98,425 IC7.8
NetIC8_2: IC8.2 R2.2 R3.2 | length 574.2
  Top Layer w15: IC8.2 4965,698.11 5100,563.11 5100,360 ; R3.2 5044.57,340 5080,340 5100,360 ; R2.2 5100,360
NetIC8_7: IC8.7 T1.1 | length 1406
  Top Layer w15: v1(4700,1040) 4705,1045 4815,1045 v1(4820,1050) ; IC8.7 4965,1045 v1(4970,1050)
  Bottom Layer w15: 3839.64,1225 3979.64,1085 4177.86,1085 4261.43,1168.57 4428.57,1168.57 4557.14,1040 v1(4700,1040) ; v1(4820,1050) v1(4970,1050)
NetIC9_1: IC9.1 IC9.4 R5.2 | length 426.9
  Top Layer w15: IC9.1 3616.08,2154.08 3639.85,2154.08 3689.15,2104.77 3689.15,2085.92 3692.48,2082.6 IC9.4 3722.01,2082.6 3729.41,2090 R5.2
NetK1_3: K1.3 S4.1 | length 2304.3
  Bottom Layer w15: S4.1 600.82,1418.56 600.82,577.37 795.25,382.93 1367.07,382.93 K1.3
NetK1_5: K1.5 OLED1.2 | length 1767.3
  Bottom Layer w15: OLED1.2 1374.38,1335.63 1957.5,752.5 1957.5,407.67 1800,250.17 K1.5
Netk2_1: k2.1 R17.2 | length 92.6
  Top Layer w15: k2.1 R17.2
Netk2_2: k2.2 R15.2 R16.1 | length 511.6
  Top Layer w15: R15.2 2383.81,477.4 2400,461.21 ; k2.2 2400,461.21 ; R16.1 2408.79,470 2400,461.21
Netk2_3: k2.3 R18.2 | length 99.3
  Top Layer w15: R18.2 2500,235.2 k2.3
Netk2_4: k2.4 LED1.1 LED2.2 | length 208.3
  Top Layer w15: k2.4 2600,230 LED1.1 LED2.2
NetK3_3: K3.3 S1.4 | length 2364.4
  Top Layer w15: S1.4 1030,470 v1(1120,560) ; v1(1590,1030) v1(2010,1450)
  Bottom Layer w15: v1(1120,560) v1(1590,1030) ; v1(2010,1450) 2010,1455 2600,2045 K3.3
NetK3_4: K3.4 S2.4 | length 2577.3
  Top Layer w15: S2.4 904.56,573.3 933.3,573.3 v1(940,580) ; v1(1500,1110) 1820,1430 1830,1430 v1(1880,1480)
  Bottom Layer w15: v1(940,580) 1463.3,1103.3 1493.3,1103.3 v1(1500,1110) ; v1(1880,1480) 1880,1538.82 2166.06,1824.88 2274.88,1824.88 K3.4
NetK3_5: K3.5 S3.4 | length 2945.6
  Top Layer w15: S3.4 422.01,430.75 422.01,488.58 932.57,999.14 1018.43,999.14 1531,1511.71 1531,1551.69 1668.08,1688.76 1668.08,1798.08 1832.91,1962.91 1942.22,1962.91 2079.3,2099.98 2350.02,2099.98 K3.5
NetK3_6: K3.6 R23.2 R24.1 | length 1676
  Top Layer w15: v1(1960,1320) 1990,1350 2000,1350 2030,1380 R23.2 R24.1 ; K3.6 2300,1880 2333.79,1846.21 2346.21,1846.21 2410,1910 v1(2540,1910)
  Bottom Layer w15: v1(1960,1320) 2097.5,1457.5 2247.5,1457.5 2372.5,1582.5 2372.5,1732.5 2510,1870 2510,1880 v1(2540,1910)
NetK3_7: K3.7
NetK3_8: K3.8 OLED1.6 | length 735.4
  Bottom Layer w15: OLED1.6 K3.8
NetK4_3: K4.3 OLED1.5 | length 627.7
  Bottom Layer w15: OLED1.5 1480,1790 K4.3
NetK4_4: K4.4 OLED1.4 | length 627.7
  Bottom Layer w15: OLED1.4 1380,1790 K4.4
NetK4_5: K4.5 OLED1.3 | length 627.7
  Bottom Layer w15: OLED1.3 1280,1790 K4.5
NetLED1_2: LED1.2 LED2.1 R18.1 | length 249.9
  Top Layer w15: R18.1 2569.92,320 2618.03,368.11 LED1.2 LED2.1
NetLED3_2: LED3.2 R17.1 | length 121.5
  Top Layer w15: LED3.2 2183.54,317.4 R17.1
NetLED4_2: LED4.2 R19.1 | length 168
  Top Layer w15: LED4.2 4501.97,1969.06 4562.6,2029.69 R19.1
NetNC1_1: NC1.1 NC2.1 | length 95.2
  Top Layer w15: NC1.1 NC2.1
NetNC3_1: NC3.1 NC4.1 | length 192.6
  Top Layer w15: NC3.1 NC4.1
NetR10_1: R10.1 R11.1 | length 174.1
  Top Layer w15: R11.1 3450,80 R10.1
VCC: C5.2 C6.2 C7.2 C8.2 C9.2 C14.1 D3.1 IC5.7 IC6.7 IC7.7 IC8.8 IC10.5 IC10.8 R16.2 R24.2 T1.3 | length 7227.7
  Top Layer w15: R24.2 2147.4,1200.16 2159.59,1187.97 2223.01,1187.97 2270.98,1140 ; v1(2340,1140) 2270.98,1140 ; R16.2 R16.2@2499.84,395.2 ; v1(2840,990) 2845.69,995.69 2999,995.69 T1.3 ; v1(3110,320) 3016.83,413.17 2583.22,413.17 2565.25,395.2 R16.2@2499.84,395.2 ; 3135.71,326.7 3284.02,475 IC7.7 ; v1(3560,190) 3560,139.65 3631.54,68.11 C9.2 C8.2 C7.2 C6.2 4124.06,64.06 4185.95,64.06 v1(4190,60) ; D3.1 4034.06,1299.03 4034.06,1525.95 C5.2 ; IC5.7 4232.39,590 4257.39,565 4425,565 v1(4430,560) 4700,830 4700,840 v1(4730,870) ; v1(4800,940) 4909.2,940 IC8.8@4915,934.2 ; IC8.8 IC8.8@4915,934.2 ; IC10.5 5071.61,1901.61 v1(5110,1940) 5110,1990 ; IC10.8 5058.39,1978.39 5070,1990 5110,1990 ; v1(5020,1460) 4990,1430 4980,1430 4980,1129.9 4915,1064.9 IC8.8@4915,934.2 ; C14.1 5110,1990 ; 2270.98,1140 2425,985.98 IC6.7 2425,922.99 2482.75,865.25 2498.21,865.25 2554.31,809.15 2554.31,449.66 R16.2@2499.84,395.2
  Bottom Layer w15: v1(2340,1140) 2490,990 v1(2840,990) ; v1(3110,320) 3430,320 v1(3560,190) ; v1(4190,60) 4190,320 v1(4430,560) ; v1(4730,870) v1(4800,940) ; v1(5020,1460) 5020,1800 5110,1890 v1(5110,1940)
pads on no net: D1.1 IC1.3 IC1.5 IC4.3 IC4.5 IC9.2 IC9.5 IC10.6 IC10.7 K1.1 K1.2 K1.4 K1.8 k2.5 k2.6 K3.1 K3.2 K4.1 K4.2 K4.6 K4.8 K6.2 K6.3 K6.5 K6.6 K7.3 S1.2 S1.3 S2.1 S2.3 S3.1 S3.3 S4.2 S4.3
copper on no net:
  other v1: 5120,630

## Text inside footprints (layer, text, board x,y; h text height)
OLED1: Top Overlay "7" at 1665.04,1596.93 h40; Top Overlay "1" at 1075.28,1596.93 h40